# EAGLE board Buck (EAGLE 9.6.2)
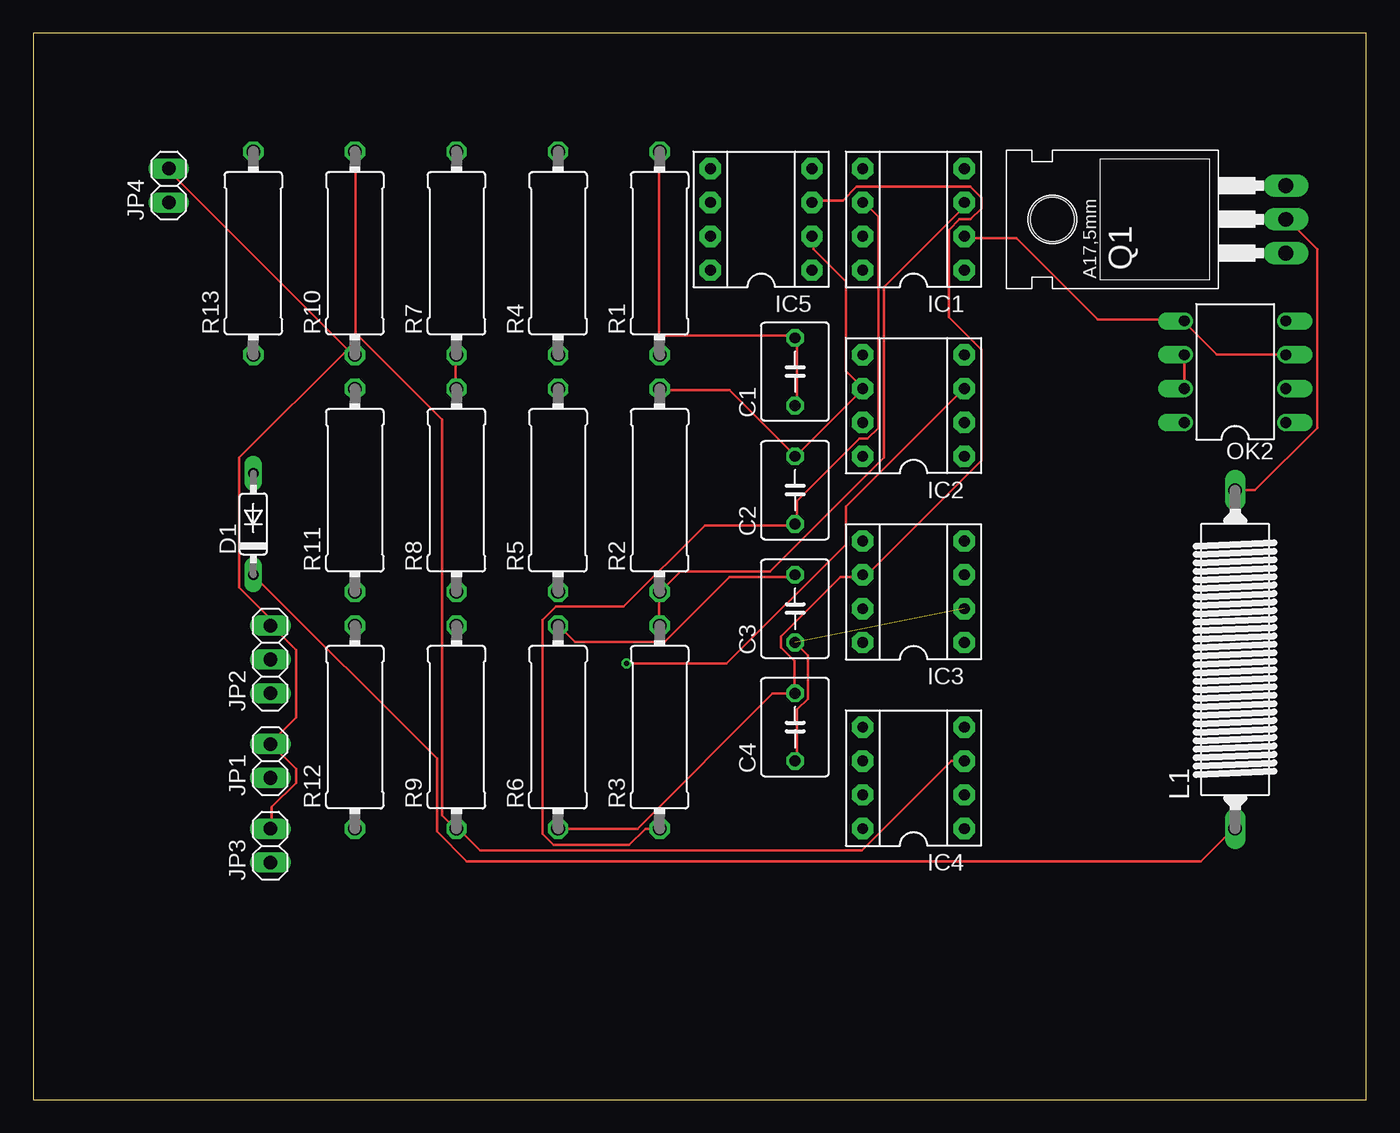
[diagram p0: board, top side]
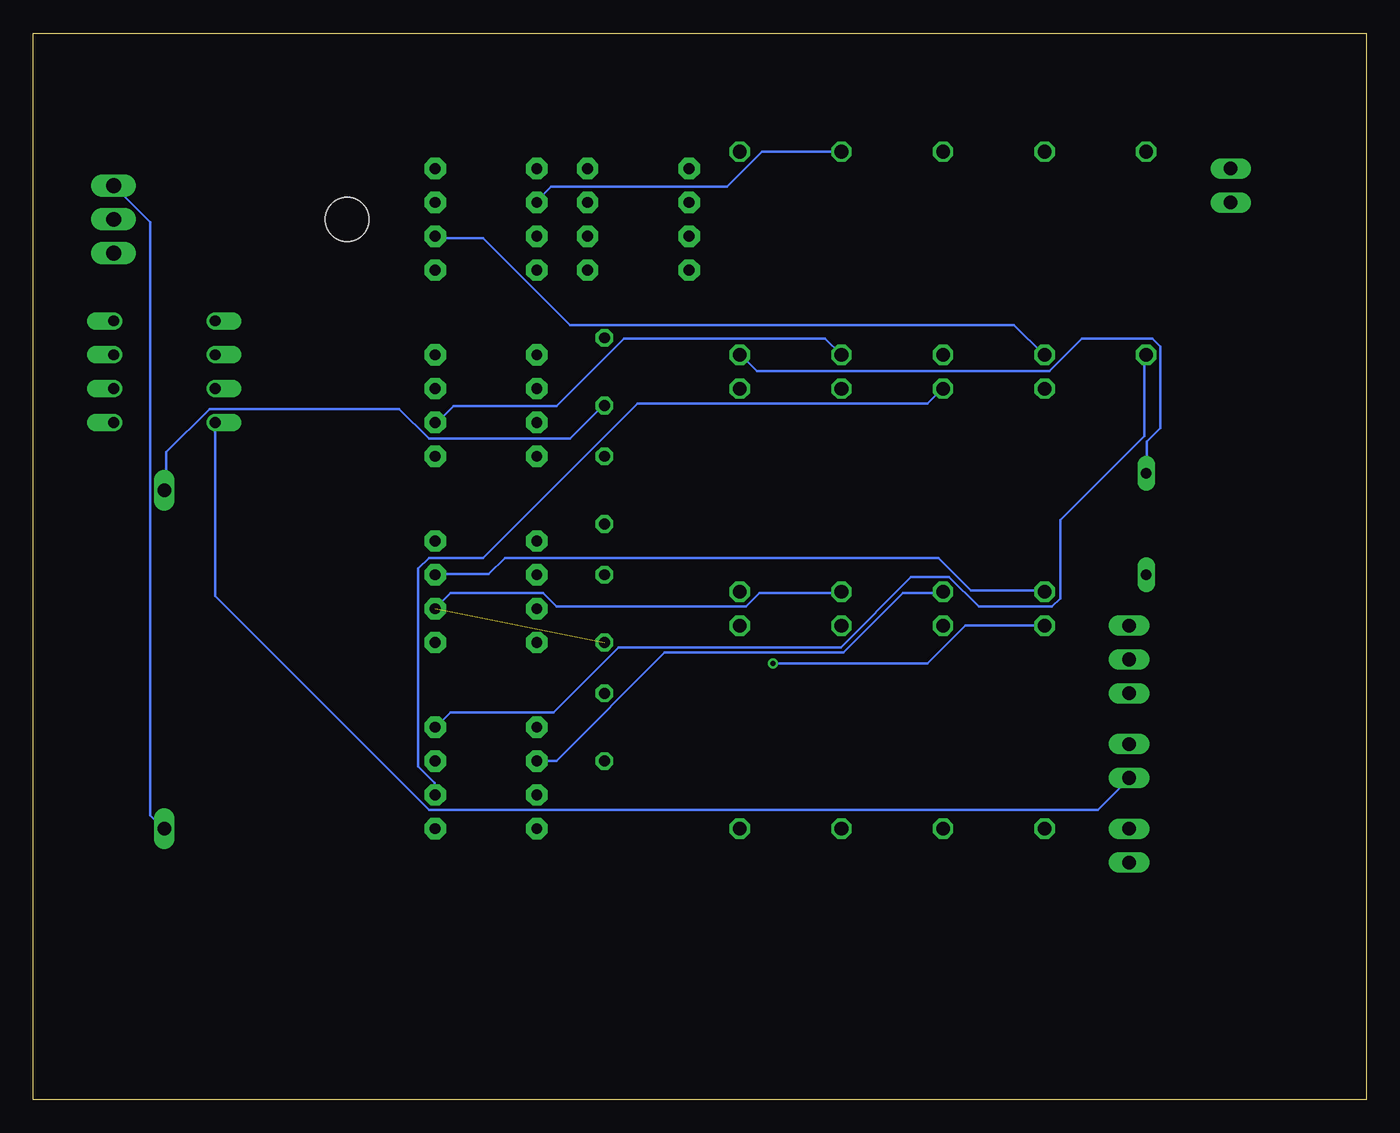
[diagram p1: board, bottom side, seen from below]

Size 100 x 80 mm. Coordinates in mm from the lower left corner, seen from the top.
Outline: 0,0 100,0 100,80 0,80 0,0
Copper layers (1*16): Top 0.035mm / dielectric 1.5mm / Bottom 0.035mm
Design rules "default": minimum track width 6mil, minimum drill 0.35mm, track to track 6mil, track to pad 6mil, pad to pad 6mil, via to via 6mil, smd to smd 6mil, copper to edge 40mil, drill to drill 6mil, minimum pad ring 10mil, minimum via ring 8mil, stop-mask expansion 4mil, vias tented up to drill 0mil, thermal gap 10mil
Net classes: 0 default: width 0.203 mm, drill 0.203 mm, clearance 0.203 mm; 1 VCC: width 0.965 mm, drill 0.203 mm, clearance 0.203 mm; 2 +15V: width 1.219 mm, drill 0.203 mm, clearance 0.203 mm; 3 GND: width 2.235 mm, drill 0.203 mm, clearance 0.203 mm; 4 -15V: width 1.219 mm, drill 0.203 mm, clearance 0.203 mm; 5 +12V: width 1.219 mm, drill 0.203 mm, clearance 0.203 mm; 6 -10V: width 1.219 mm, drill 0.203 mm, clearance 0.203 mm

## Footprints (pad centres in the part's own frame; a part is rotated, then mirrored left to right if it is on the bottom)
C050-050X075 = drill 0.813 octagon: 1 -2.54,0; 2 2.54,0
DO35-7 = drill 0.813 long: A 3.81,0; C -3.81,0
DIL08 = drill 0.813 pad 1.6 octagon: 1 -3.81,-3.81; 2 -1.27,-3.81; 3 1.27,-3.81; 4 3.81,-3.81; 5 3.81,3.81; 6 1.27,3.81; 7 -1.27,3.81; 8 -3.81,3.81
1X02 = drill 1.016 long: 1 -1.27,0; 2 1.27,0
1X03 = drill 1.016 long: 1 -2.54,0; 2 0,0; 3 2.54,0
DR1,5A = drill 1.016 long: 1 -12.7,0; 2 12.7,0
DIL08' = drill 0.813 offset: 1 -3.81,-3.81; 2 -1.27,-3.81; 3 1.27,-3.81; 4 3.81,-3.81; 5 3.81,3.81; 6 1.27,3.81; 7 -1.27,3.81; 8 -3.81,3.81
TO220 = drill 1.118 long: 1 -2.54,-6.35; 2 0,-6.35; 3 2.54,-6.35 | hole 3.302: 0,11.176
0414/15 = drill 1.016 octagon: 1 -7.62,0; 2 7.62,0

## Placement (x,y rotation side)
C1  100u  [C050-050X075]  57.15,54.61 90 top
C2  0.01u  [C050-050X075]  57.15,45.72 90 top
C3  3.96nF  [C050-050X075]  57.15,36.83 90 top
C4  1.18nF  [C050-050X075]  57.15,27.94 90 top
D1  1N4148DO35-7  [DO35-7]  16.51,43.18 90 top
IC1  OPA650P  [DIL08]  66.04,66.04 90 top
IC2  OPA650P  [DIL08]  66.04,52.07 90 top
IC3  OPA650P  [DIL08]  66.04,38.1 90 top
IC4  OPA650P  [DIL08]  66.04,24.13 90 top
IC5  OPA650P  [DIL08]  54.61,66.04 90 top
JP1  [1X02]  17.78,25.4 90 top
JP2  [1X03]  17.78,33.02 90 top
JP3  [1X02]  17.78,19.05 90 top
JP4  [1X02]  10.16,68.58 90 top
L1  50uH,15A  [DR1,5A]  90.17,33.02 90 top
OK2  HCPL2219  [DIL08']  90.17,54.61 90 top
Q1  BUZ10  [TO220]  87.63,66.04 90 top
R1  2ohm  [0414/15]  46.99,63.5 90 top
R2  10k  [0414/15]  46.99,45.72 90 top
R3  30k  [0414/15]  46.99,27.94 90 top
R4  7.5k  [0414/15]  39.37,63.5 90 top
R5  10K  [0414/15]  39.37,45.72 90 top
R6  245.5k  [0414/15]  39.37,27.94 90 top
R7  0.0520k  [0414/15]  31.75,63.5 90 top
R8  5.20k  [0414/15]  31.75,45.72 90 top
R9  0.0520K  [0414/15]  31.75,27.94 90 top
R10  5.20k  [0414/15]  24.13,63.5 90 top
R11  5  [0414/15]  24.13,45.72 90 top
R12  5  [0414/15]  24.13,27.94 90 top
R13  1ohm  [0414/15]  16.51,63.5 90 top

## Library data of the parts
C1-C4 = rcl; SPICEPREFIX: C
D1 = diode
IC1-IC5 = burr-brown; OC_FARNELL: unknown; OC_NEWARK: unknown
JP1-JP4 = pinhead
L1 = inductors; SPICEPREFIX: L
OK2 = optocoupler; MF: AGILENT TECHNOLOGIES; MPN: HCPL-2219-000E; OC_FARNELL: 9995250; OC_NEWARK: 31K6963
Q1 = transistor-fet
R1-R13 = rcl; SPICEPREFIX: R

## Nets
+12V: JP4.1
+15V: JP2.1
-10V: JP3.1
-15V: JP2.2
GND: IC1.2 JP1.2 JP2.3 JP3.2 JP4.2 OK2.3 OK2.5 R10.1
N$1: D1.C L1.1 Q1.3
N$2: IC4.4 R13.1
N$3: IC1.3 R2.1 R3.2
N$4: OK2.6 OK2.7
N$5: IC2.2 R4.1
N$7: C3.1 C4.1 IC3.2 R5.1
N$8: C3.2 R6.2
N$9: C2.1 IC1.6 R3.1 R4.2
N$10: IC1.7
N$11: IC1.4
N$13: IC4.3 R9.1 R10.2
N$14: IC4.2 R7.1 R8.2
N$15: IC2.3 R12.2
N$16: IC2.7
N$17: IC3.7
N$18: IC3.4
N$20: IC4.7
N$21: IC5.7
N$22: IC5.4
N$23: IC2.4
N$24: IC3.3 R11.1
N$25: R9.2
N$26: R11.2
N$27: R12.1
VC: C4.2 IC3.6 IC5.3 R6.1
VCC: JP1.1 OK2.8
VOUT: C1.1 C1.2 D1.A L1.2 Q1.2 R1.1 R1.2
VS: IC4.6 R8.1
VSWI: IC5.6
VTRI: C2.2 IC2.6 IC5.2 R2.2

## Tracks (layer width: path | path; a pad name or v marks a point on that pad's centre or on a via)
GND
  Top 0.203: OK2.3 88.8,55.88 86.36,58.32 OK2.5 86.36,58.52 79.86,58.52 73.76,64.62 69.9,64.62 IC1.2 | JP3.2 17.88,20.32 17.88,21.95 19.71,23.77 19.71,24.79 17.88,26.62 JP1.2 17.88,26.82 19.71,28.65 19.71,33.73 17.88,35.56 JP2.3 17.68,35.56 17.68,36.17 15.44,38.41 15.44,48.16 23.57,56.29 | 23.57,56.29 10.16,69.7 JP4.2 | 23.57,56.29 23.98,55.88 R10.1 23.57,56.29
  Bottom 0.203: IC1.2 69.7,64.62 66.24,64.62 59.74,58.12 26.42,58.12 24.18,55.88 R10.1
N$1
  Top 0.203: D1.C 30.28,25.6 30.28,20.12 32.51,17.88 87.58,17.88 90.02,20.32 L1.1
  Bottom 0.203: Q1.3 91.24,65.84 91.24,21.34 90.22,20.32 L1.1
N$2
  Bottom 0.203: R13.1 16.66,55.88 16.66,49.78 22.96,43.48 22.96,37.59 23.57,36.98 29.06,36.98 31.29,39.22 34.14,39.22 39.42,33.93 56.08,33.93 60.96,29.06 68.68,29.06 69.7,28.04 IC4.4
N$3
  Top 0.203: R3.2 46.94,35.56 46.94,38 R2.1 47.14,38.2 48.56,39.62 55.27,39.62 63.8,48.16 63.8,60.96 69.7,66.85 69.7,67.26 IC1.3
N$4
  Top 0.203: OK2.6 OK2.7
N$5
  Bottom 0.203: R4.1 40.59,57.1 55.68,57.1 60.76,52.02 68.48,52.02 69.7,50.8 IC2.2
N$7  (1 unrouted)
  Top 0.203: C3.1 58.12,33.33 58.12,30.07 57.3,29.26 57.3,25.4 C4.1
  Bottom 0.203: IC3.2 68.68,38 61.77,38 60.76,36.98 46.53,36.98 45.52,38 39.42,38 R5.1
N$8
  Top 0.203: C3.2 57.1,39.22 52.22,39.22 47.35,34.34 40.64,34.34 39.42,35.56 R6.2
N$9
  Top 0.203: IC1.6 62.38,67.26 63.4,66.24 63.4,50.39 62.59,49.58 61.98,49.58 57.3,44.91 57.3,43.28 C2.1 57.1,43.08 50.39,43.08 44.3,36.98 39.22,36.98 38.2,35.97 38.2,19.91 39.01,19.1 44.7,19.1 45.92,20.32 R3.1
  Bottom 0.203: R4.2 45.31,71.12 47.95,68.48 61.16,68.48 62.18,67.46 IC1.6
N$13
  Top 0.203: R10.2 24.18,71.12 24.18,57.51 30.68,51 30.68,21.34 31.7,20.32 R9.1 31.9,20.32 33.53,18.69 62.18,18.69 68.89,25.4 IC4.3
N$14
  Top 0.203: R8.2 31.7,53.44 31.7,55.88 R7.1
  Bottom 0.203: IC4.2 69.9,22.96 69.9,23.77 71.12,24.99 71.12,39.83 70.31,40.64 66.24,40.64 54.66,52.22 32.92,52.22 31.9,53.24 R8.2
N$15  (via drill 0.35)
  Top 0.203: v44.5,32.72 52.02,32.72 60.96,41.66 60.96,44.5 69.7,53.24 IC2.3
  Bottom 0.203: R12.2 30.07,35.56 32.92,32.72 v44.5,32.72
N$24
  Bottom 0.203: R11.1 24.18,38.2 29.67,38.2 32.11,40.64 64.62,40.64 65.84,39.42 69.7,39.42 IC3.3
VC
  Top 0.203: 57.1,30.48 57.1,32.92 56.08,33.93 56.08,34.75 60.55,39.22 62.18,39.22 IC3.6 62.38,39.22 71.12,47.95 71.12,56.29 68.68,58.73 68.68,65.23 69.49,66.04 70.31,66.04 71.12,66.85 71.12,67.67 70.31,68.48 61.77,68.48 60.76,67.46 58.52,67.46 IC5.3 | R6.1 45.31,20.32 55.47,30.48 57.1,30.48 | 57.1,30.48 C4.2
VCC
  Bottom 0.203: OK2.8 86.36,37.8 70.31,21.74 20.12,21.74 17.88,23.98 JP1.1
VOUT
  Top 0.203: L1.2 91.64,45.72 96.32,50.39 96.32,63.8 94.08,66.04 Q1.2 | C1.1 57.3,52.22 57.3,57.1 C1.2 57.1,57.3 46.94,57.3 | 46.94,57.3 46.94,55.88 R1.1 | 46.94,57.3 46.94,71.12 R1.2
  Bottom 0.203: D1.A 16.46,47.14 16.46,49.38 15.44,50.39 15.44,56.49 16.05,57.1 21.34,57.1 23.77,54.66 45.72,54.66 46.94,55.88 R1.1 | L1.2 90.02,45.72 90.02,48.56 86.77,51.82 72.54,51.82 70.31,49.58 59.74,49.58 57.3,52.02 C1.1
VS
  Bottom 0.203: IC4.6 60.76,25.4 52.63,33.53 39.22,33.53 34.75,38 31.9,38 R8.1
VTRI
  Top 0.203: R2.2 47.14,53.24 52.22,53.24 57.1,48.36 C2.2 57.3,48.36 62.18,53.24 IC2.6 62.18,53.44 60.96,54.66 60.96,61.37 58.52,63.8 58.52,64.62 IC5.2